# EAGLE board LED_letter_H (EAGLE 8.6.0)
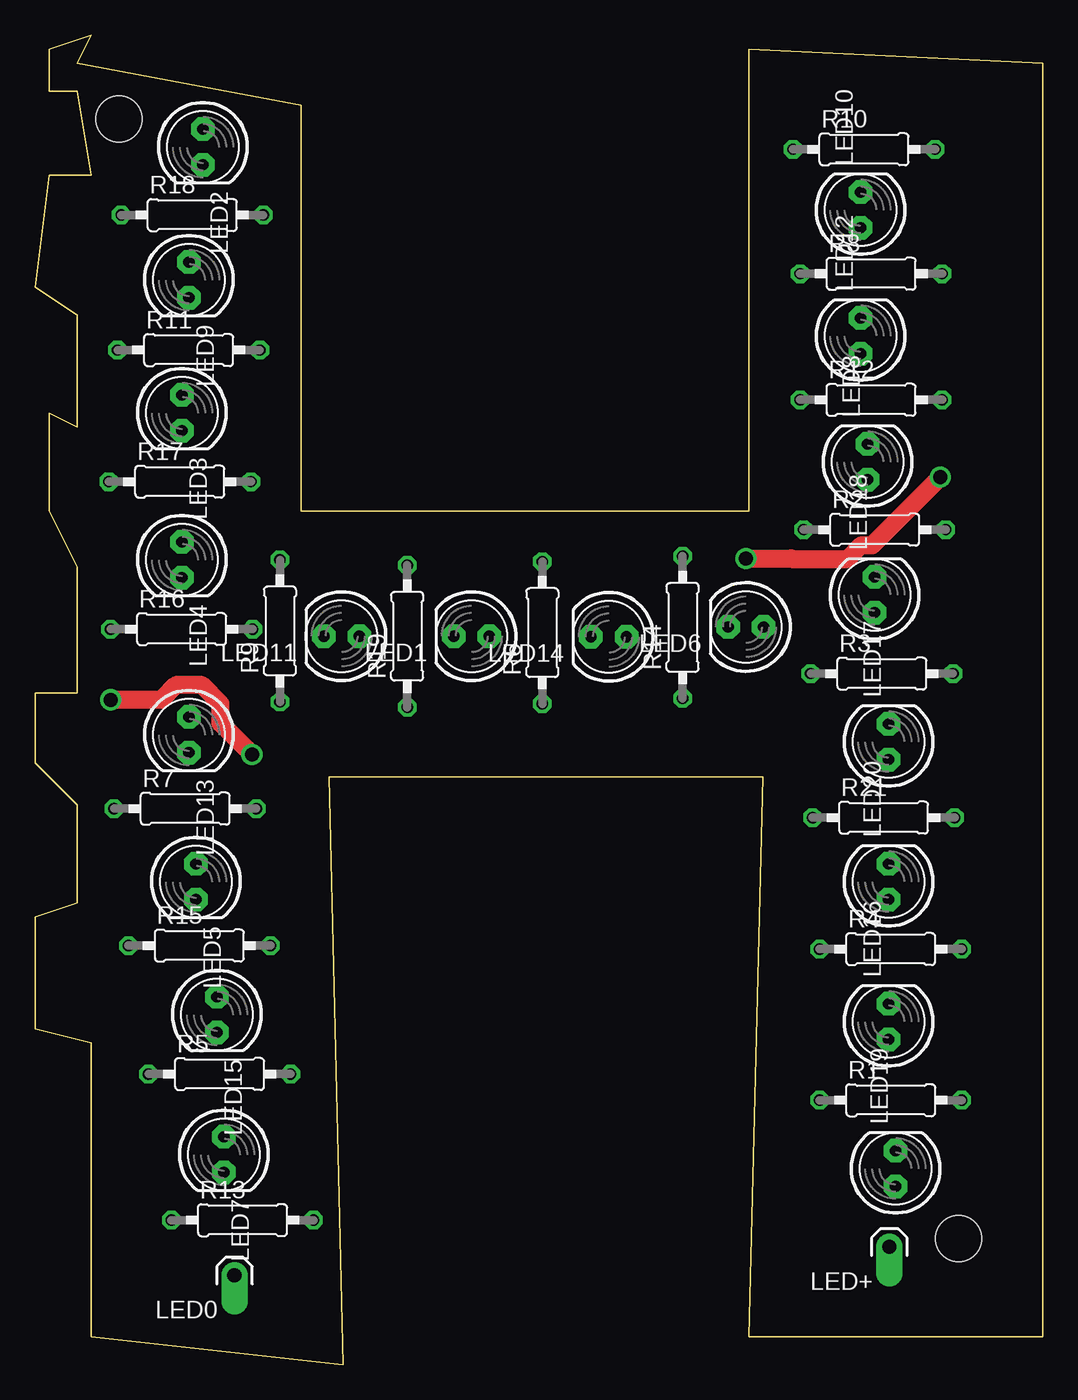
[diagram p0: board, top side]
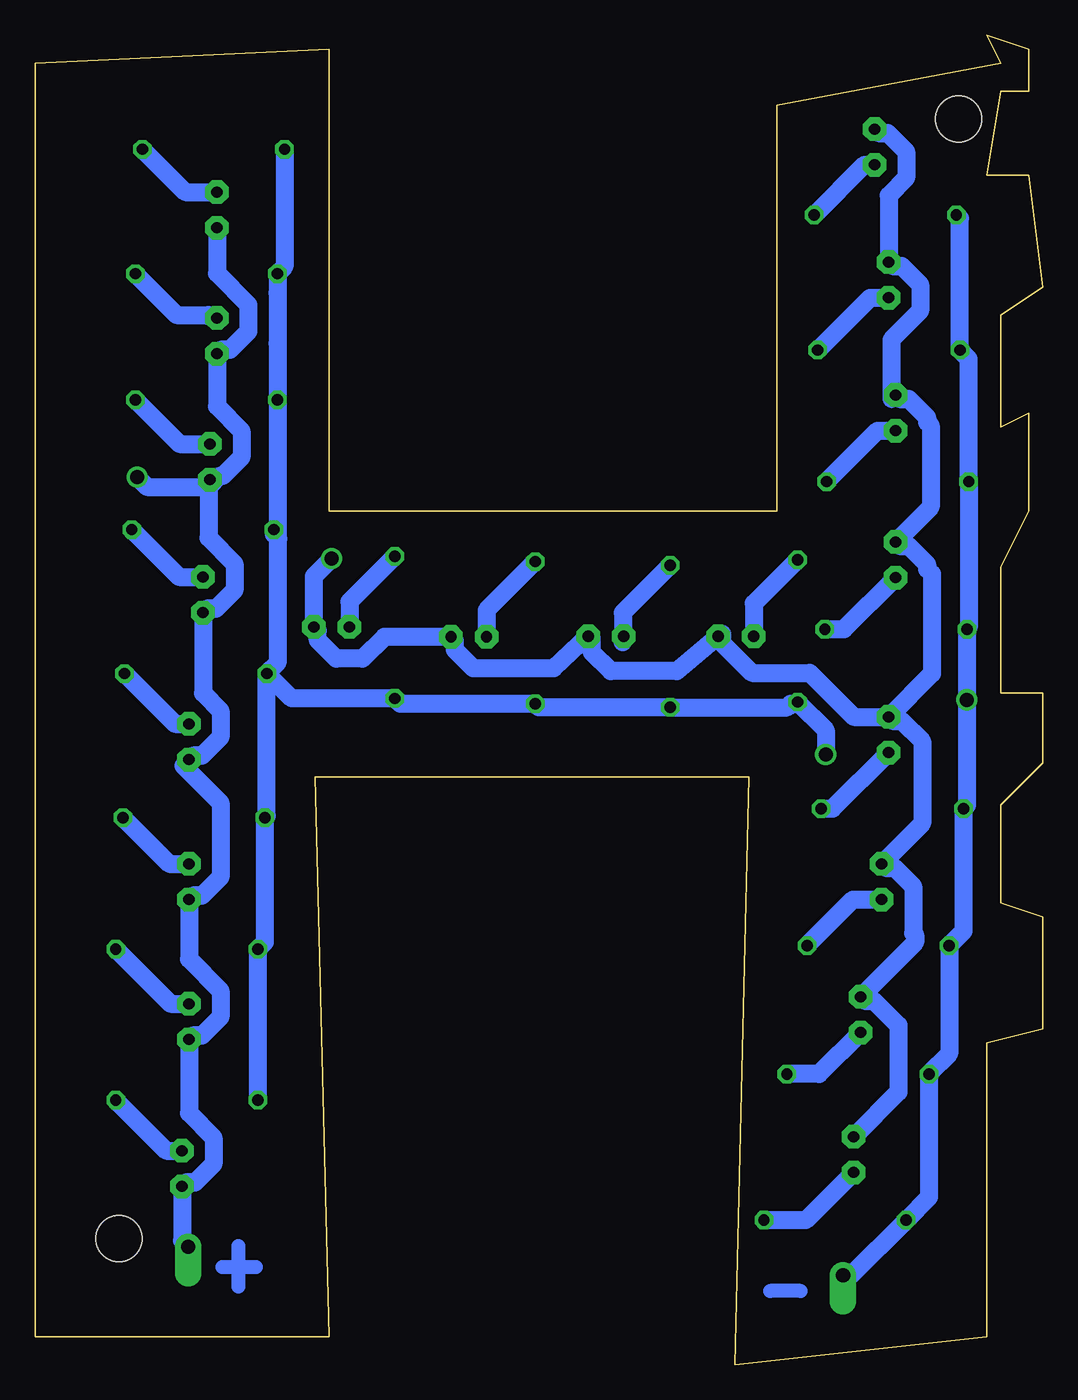
[diagram p1: board, bottom side, seen from below]

Size 72 x 95 mm. Coordinates in mm from the lower left corner, seen from the top.
Outline: 3,93 19,90 19,61 51,61 51,94 72,93 72,2 51,2 52,42 21,42 22,0 4,2 4,23 0,24 0,32 3,33 3,40 0,43 0,48 3,48 3,57 1,61 1,68 3,67 3,75 0,77 1,85 4,85 3,91 1,91 1,94 4,95 3,93
Copper layers (1*16): Top 0.035mm / dielectric 1.5mm / Bottom 0.035mm
Design rules "OthermillDRC_1_32_v2": minimum track width 8mil, minimum drill 0.8mm, track to track 0.794003125mm, track to pad 0.794003125mm, pad to pad 0.794003125mm, via to via 0.794003125mm, smd to smd 0mil, copper to edge 0mil, drill to drill 1mil, minimum pad ring 10mil, minimum via ring 10mil, stop-mask expansion 1mil, vias tented up to drill 30mil, thermal gap 10mil
Holes 3.3 mm at 66,9 6,89

## Footprints (pad centres in the part's own frame; a part is rotated, then mirrored left to right if it is on the bottom)
1X01_OFFSET = drill 1.016 pad 1.88 offset: 1 0,0
LED5MM = drill 0.813 pad 1.676 octagon: A -1.27,0; K 1.27,0
0207/10 = drill 0.813 octagon: 1 -5.08,0; 2 5.08,0

## Placement (x,y rotation side)
LED0  LED-  [1X01_OFFSET]  14.25,6.38 180 top
LED1  [LED5MM]  31.2,52.04 180 top
LED2  [LED5MM]  12,87 270 top
LED3  [LED5MM]  10.5,68 270 top
LED4  [LED5MM]  10.5,57.5 270 top
LED5  [LED5MM]  11.5,34.5 270 top
LED6  [LED5MM]  50.8,52.7 180 top
LED7  [LED5MM]  13.5,15 270 top
LED8  [LED5MM]  59.5,64.5 90 top
LED9  [LED5MM]  11,77.5 270 top
LED10  [LED5MM]  59,82.5 90 top
LED11  [LED5MM]  21.9,52.04 180 top
LED12  [LED5MM]  59,73.5 90 top
LED13  [LED5MM]  11,45 270 top
LED14  [LED5MM]  41,52 180 top
LED15  [LED5MM]  13,25 270 top
LED16  [LED5MM]  61,24.5 90 top
LED17  [LED5MM]  61,44.5 90 top
LED18  [LED5MM]  60,55 90 top
LED19  [LED5MM]  61.5,14 90 top
LED20  [LED5MM]  61,34.5 90 top
LED+  LED+  [1X01_OFFSET]  61.05,8.41 180 top
R1  220  [0207/10]  61.15,18.89 0 top
R2  220  [0207/10]  60.01,59.66 0 top
R3  220  [0207/10]  60.52,49.37 0 top
R4  220  [0207/10]  61.15,29.69 0 top
R5  220  [0207/10]  13.19,20.76 0 top
R6  220  [0207/10]  36.26,52.29 90 top
R7  220  [0207/10]  10.73,39.72 0 top
R8  220  [0207/10]  59.75,77.95 0 top
R9  220  [0207/10]  17.51,52.42 90 top
R10  220  [0207/10]  59.24,86.84 0 top
R11  220  [0207/10]  10.98,72.48 0 top
R12  220  [0207/10]  59.75,68.93 0 top
R13  220  [0207/10]  14.83,10.32 0 top
R14  220  [0207/10]  46.28,52.67 90 top
R15  220  [0207/10]  11.75,29.94 0 top
R16  220  [0207/10]  10.48,52.55 0 top
R17  220  [0207/10]  10.35,63.09 0 top
R18  220  [0207/10]  11.24,82.14 0 top
R19  220  [0207/10]  26.6,52.04 90 top
R21  220  [0207/10]  60.64,39.08 0 top

## Library data of the parts
LED0 LED+ = SparkFun
LED1-LED20 = adafruit-2014
R1-R19 R21 = resistor

## Nets
+: LED1.A LED2.A LED3.A LED4.A LED5.A LED6.A LED7.A LED8.A LED9.A LED10.A LED11.A LED12.A LED13.A LED14.A LED15.A LED16.A LED17.A LED18.A LED19.A LED20.A LED+.1
-: LED0.1 R1.1 R2.1 R3.1 R4.1 R5.1 R6.1 R7.1 R8.1 R9.1 R10.1 R11.1 R12.1 R13.1 R14.1 R15.1 R16.1 R17.1 R18.1 R19.1 R21.1
N$1: LED1.K R19.2
N$5: LED20.K R21.2
N$6: LED19.K R1.2
N$7: LED18.K R2.2
N$8: LED17.K R3.2
N$9: LED16.K R4.2
N$10: LED15.K R5.2
N$11: LED14.K R6.2
N$12: LED13.K R7.2
N$13: LED12.K R8.2
N$14: LED11.K R9.2
N$15: LED10.K R10.2
N$16: LED9.K R11.2
N$17: LED8.K R12.2
N$18: LED7.K R13.2
N$19: LED6.K R14.2
N$20: LED5.K R15.2
N$21: LED4.K R16.2
N$22: LED3.K R17.2
N$23: LED2.K R18.2

## Tracks (layer width: path | path; a pad name or v marks a point on that pad's centre or on a via)
+  (via drill 1)
  Top 1.27: v50.8,57.6 54.03,57.6 54.06,57.57 58.09,57.57 59.06,58.54 59.84,58.54 v64.7,63.4
  Bottom 1.27: LED2.A 11.73,88 11.06,88 9.73,86.67 9.73,84.79 11,83.52 LED9.A 10.73,78.5 10.06,78.5 8.73,77.17 8.73,75.29 10.8,73.22 10.8,69 10.77,69 LED3.A 10.23,69 9.56,69 8.23,67.67 8.23,67.33 8,67.1 8,61.27 LED4.A 10.23,58.5 9.56,58.5 8.23,57.17 8.23,56.83 7.9,56.5 7.9,49.37 LED13.A | LED13.A 10.73,46 10.06,46 8.6,44.54 8.6,38.67 LED5.A 11.23,35.5 10.56,35.5 9.23,34.17 9.23,30.83 9.1,30.7 9.1,30.17 LED15.A 12.73,26 12.06,26 10.3,24.24 10.3,19.47 LED7.A | LED10.A 59,77.98 56.73,75.71 56.73,73.83 58.06,72.5 58.73,72.5 LED12.A 59,68.48 57.23,66.71 57.23,64.83 58.56,63.5 58.8,63.5 59.6,62.7 | 59.6,62.7 59.6,63.13 LED8.A | 59.6,62.7 59.6,59.08 57.73,57.21 57.73,55.33 59.06,54 59.73,54 LED18.A 60,47.98 58.73,46.71 58.73,44.83 60.06,43.5 60.7,43.5 61,43.2 | 61,43.2 61.4,42.8 58.73,40.13 58.73,34.83 60.06,33.5 60.73,33.5 LED20.A 61,28.98 58.73,26.71 58.73,24.83 60.06,23.5 60.73,23.5 LED16.A 61,17.98 59.23,16.21 59.23,14.33 60.56,13 61.23,13 LED19.A 61.5,8.86 LED+.1 | 61,43.2 LED17.A | v50.8,57.6 52.07,56.33 LED6.A 51.8,52.43 51.8,51.76 50.47,50.43 48.59,50.43 47.02,52 LED14.A 42,51.73 42,51.06 40.67,49.73 34.94,49.73 LED1.A 32.2,51.93 32.2,50.88 30.86,49.54 26.13,49.54 LED11.A 22.9,52.23 22.9,51.56 20.77,49.43 16.64,49.43 13.48,46.27 LED13.A | v64.7,63.4 64,62.7 59.6,62.7
-  (via drill 1)
  Top 1.27: v15.5,43.6 13.27,45.83 13.27,47.21 11.94,48.54 10.06,48.54 9.02,47.5 v5.4,47.5
  Bottom 1.27: LED0.1 13.69,6.38 R13.1 8.11,11.96 R5.1 6.67,22.2 R15.1 5.65,30.96 R7.1 5.4,39.97 v5.4,47.5 R16.1 5.27,52.67 R17.1 5.27,71.85 R11.1 5.9,81.88 R18.1 | R3.1 53.66,47.59 R14.1 45.9,47.21 R6.1 36,46.96 R19.1 18.24,46.96 18,47.2 17.65,47.2 R9.1 15.5,45.33 v15.5,43.6 | R3.1 55.44,39.21 R21.1 55.56,30.19 R4.1 R1.1 | R10.1 54.16,78.45 R8.1 54.67,76.57 54.67,76.56 54.67,72.98 54.67,72.97 R12.1 54.67,59.07 | 54.67,59.07 54.6,59 | 54.67,59.07 54.93,59.33 R2.1 | 54.67,59.07 54.67,50.13 R3.1
N$1
  Bottom 1.27: R19.2 30,53.72 30,52.13 | 30,51.6 30,52.13 | 30,52.13 LED1.K
N$2
  Bottom 1.016: 17.3,5.26 19.46,5.26
N$3
  Bottom 1.016: 56.2,6.95 58.61,6.95
N$4
  Bottom 1.016: 57.47,8.48 57.47,5.56
N$5
  Bottom 1.27: R21.2 62.41,35.77 LED20.K
N$6
  Bottom 1.27: R1.2 62.61,15.27 LED19.K
N$7
  Bottom 1.27: R2.2 61.7,56.27 LED18.K
N$8
  Bottom 1.27: R3.2 61.99,45.77 LED17.K
N$9
  Bottom 1.27: R4.2 62.31,25.77 LED16.K
N$10
  Bottom 1.27: LED15.K 15.97,20.76 R5.2
N$11
  Bottom 1.27: R6.2 39.73,53.9 LED14.K
N$12
  Bottom 1.27: R7.2 15.01,39.72 LED13.K
N$13
  Bottom 1.27: R8.2 61.89,75 59.6,75 59.37,74.77 LED12.K
N$14
  Bottom 1.27: R9.2 20.63,54.38 LED11.K
N$15
  Bottom 1.27: R10.2 61.26,83.77 LED10.K
N$16
  Bottom 1.27: R11.2 12.32,76.23 LED9.K
N$17
  Bottom 1.27: R12.2 61.67,65.77 LED8.K
N$18
  Bottom 1.27: LED7.K 16.91,10.32 R13.2
N$19
  Bottom 1.27: R14.2 49.53,54.51 LED6.K
N$20
  Bottom 1.27: R15.2 13.54,33.23 LED5.K
N$21
  Bottom 1.27: R16.2 14.18,52.55 LED4.K
N$22
  Bottom 1.27: R17.2 11.79,66.73 LED3.K
N$23
  Bottom 1.27: R18.2 12.73,85.73 LED2.K